# Altium PCB PCB1.PcbDoc (part 2 of 2)
Units mm, origin at the board's own origin, x right, y up, seen from the top; angles counter-clockwise.
Board outline 50.75 x 57.45 mm, 4 copper layers (Top Layer, GND, PWR, Bottom Layer), stack 1.591 mm thick; 64 components, 47 nets, 256 pads, 141 vias.
Unrouted connection lines stored in the file: 59.
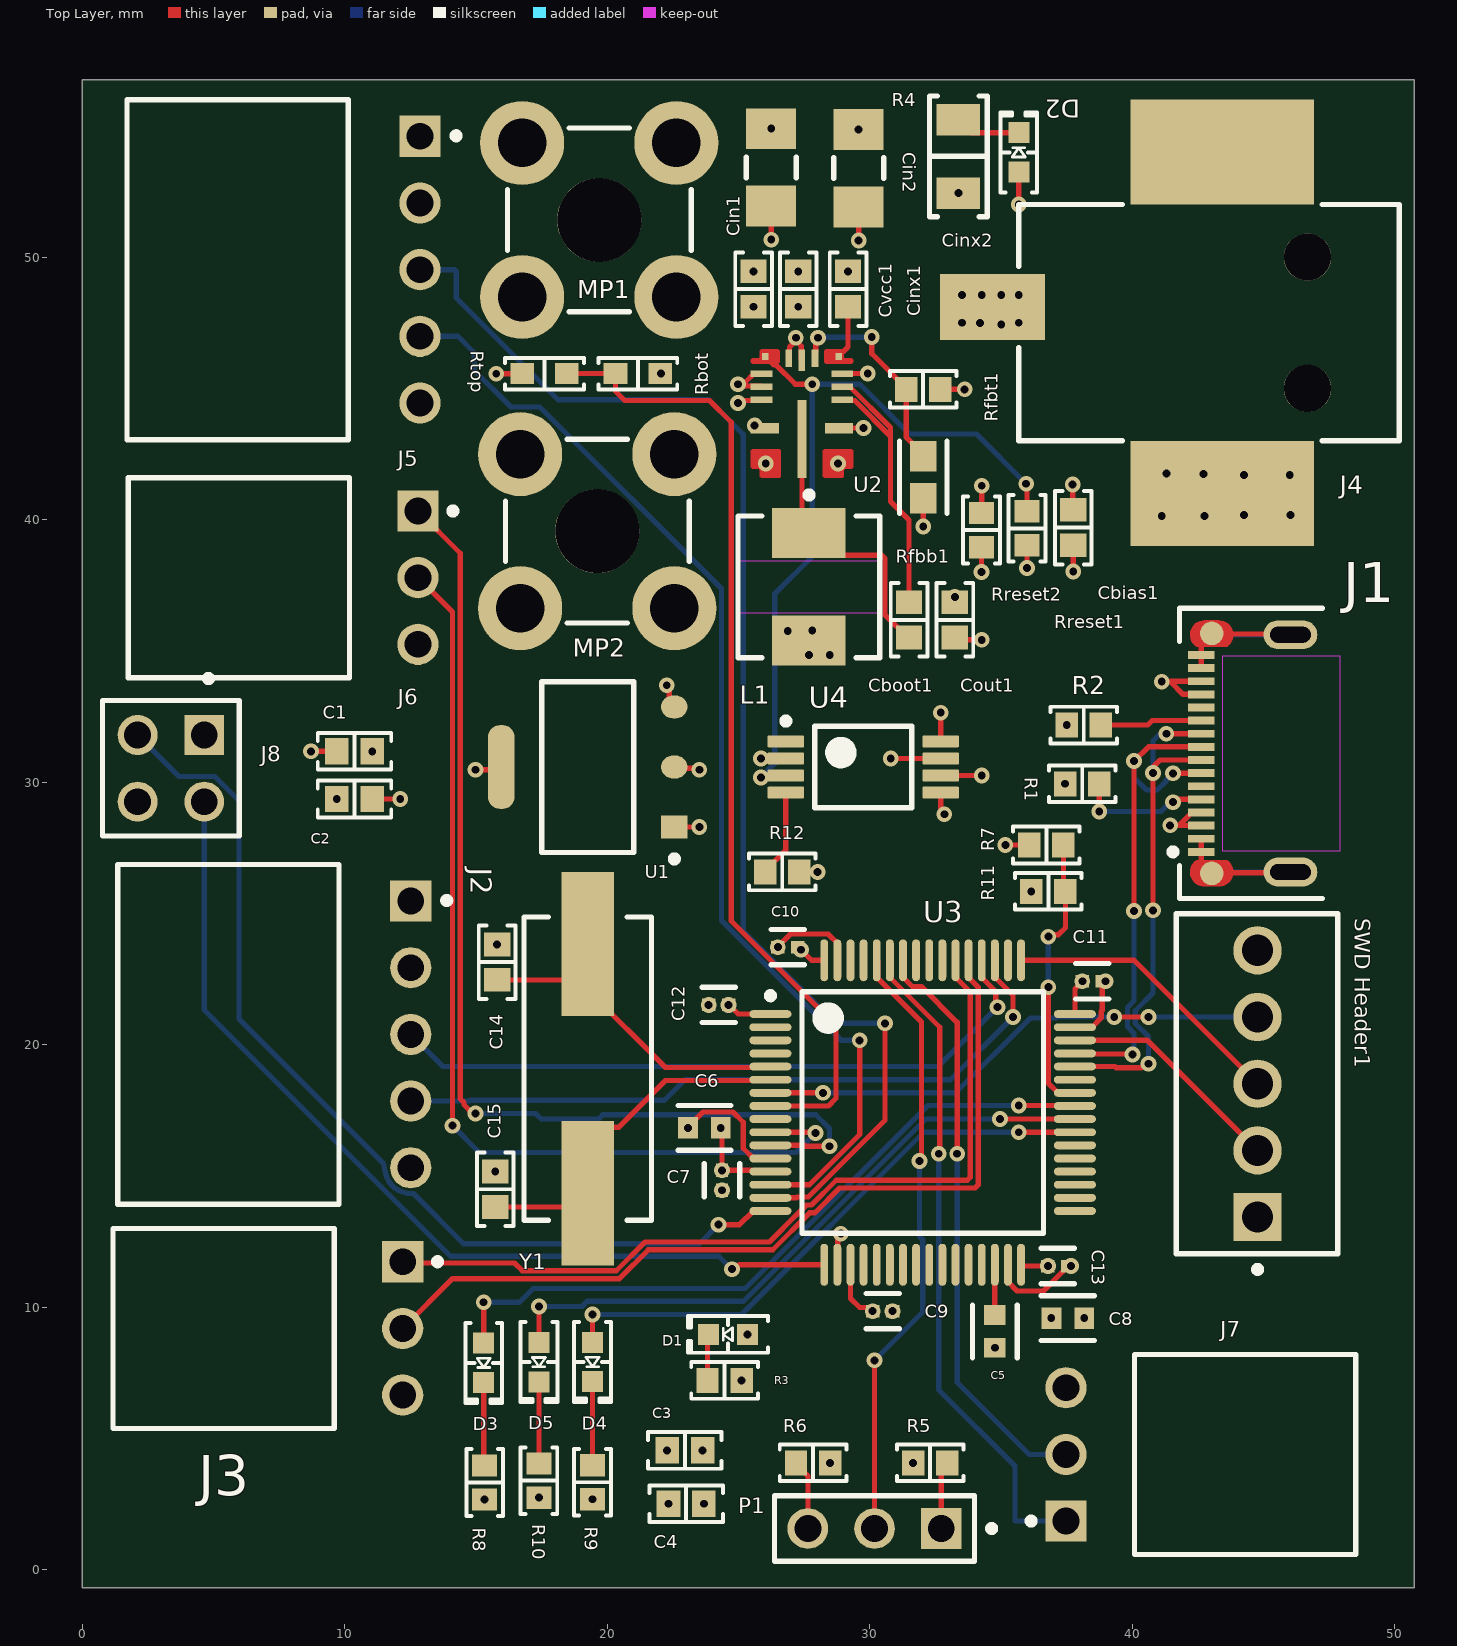
[diagram p0: Top Layer view]

## Via types
v1: diameter 0.6, hole 0.3, Top Layer to Bottom Layer, tented both sides, 140 vias
v2: diameter 0.6, hole 0.3, Top Layer to Bottom Layer, tented top, 1 vias

## Nets (pads, with @x,y where several pads share a name; then routed paths per layer and width w, separated by ;. In a path a pad name is that pad's centre, name@x,y a point inside that pad or via, vN(x,y) a via of type N, cw(c..) or ccw(c..) an arc to the next point about the centre after c; other vN are vias at no path point) (continued)
5V_SYS: (continued)
  Top Layer w0.2: v1(8.713,31.179) C1.2 ; C2.2 v1(12.114,29.362) ; v1(22.268,33.694) 22.268,33.586 22.361,33.493 22.361,33.066 U1.3 ; v1(30.799,30.907) U4.7
  PWR w0.2: v1(22.268,33.694) v1@22.333,33.628
5V_USB: J1.A4 J1.A9 J1.B4 J1.B9 R7.2 U4.6 | length 7.6
  Top Layer w0.2: U4.6 v1(34.266,30.257) ; v1(35.166,27.609) R7.2 ; v1(41.127,33.834) 41.446,33.834 ; v1(41.446,28.359) 41.786,28.359 ; J1.A4 41.795,28.35 41.786,28.359 ; J1.B9 42.277,28.85 41.786,28.359 ; J1.B4 41.93,33.35 41.446,33.834 ; J1.A9 41.462,33.85 41.446,33.834
26V0: Cin1.1 Cin2.1 Cinx1.1 Cinx2.1 MP1.1 Rtop.1 U2.2 U2.13 U2.14 | length 5.9
  Top Layer w0.2: v1(15.773,45.561) 16.753,45.561 Rtop.1 ; v1(24.98,44.448) 25.088,44.448 25.184,44.544 25.853,44.544 U2.13 ; v1(25.616,43.596) 25.718,43.494 U2.14 ; v1(26.246,50.671) Cin1.1 ; U2.2 28.832,43.497 29.763,43.497 v1(29.766,43.5) ; v1(29.578,50.644) Cin2.1
  other v1: 25.576,48.113 27.279,48.113
BOOT0: P1.2 U3.60 | length 23.2
  Top Layer w0.2: P1.2 v1(30.184,7.979) ; U3.60 30.301,23.184 30.301,22.539 31.975,20.865 31.975,15.649 v1(31.9,15.574)
  Bottom Layer w0.2: v1(30.184,7.979) 32.016,9.81 32.016,12.58 31.9,12.696 v1(31.9,15.574)
GND: "SWD Header1.5" C1.1 C2.1 C3.1 C4.1 C5.2 C6.2 C7.2 C8.2 C9.2 C10.2 C11.2 C12.2 C13.2 C14.1 C15.1 Cbias1.2 Cin1.2 Cin2.2 Cinx1.2 Cinx2.2 Cout1.2 Cvcc1.2 J1.1 J1.2 J1.3 J1.4 J1.A1 J1.A12 J1.B1 J1.B12 J2.2 J3.3 J4.2 J5.2 J6.3 J7.3 J8.4 MP2.1 R1.1 R2.1 R3.1 R4.2 R6.1 R8.1 R9.1 R10.1 R11.1 R12.2 Rbot.2 Rfbb1.2 Rreset2.2 U1.1 U2.1 U2.8 U2.9 U2.11 U2.12 U2.15 U3.12 U3.18 U3.31 U3.47 U3.63 U4.2 U4.5 | length 40.8
  Top Layer w0.2: U1.1 v1(23.51,28.292) ; v1(23.072,16.835) 23.072,16.862 23.651,17.442 24.788,17.442 25.18,17.049 25.18,16.055 25.566,15.669 U3.12 ; v1(25.854,30.907) U4.2 ; U2.12 25.853,45.094 25.047,45.094 v1(24.98,45.161) 25.056,45.238 25.259,45.238 25.59,45.569 U2.11 ; v1(26.5,23.719) 26.521,23.719 26.658,23.855 26.658,23.897 26.98,24.219 28.416,24.219 28.766,23.869 U3.63 ; U2.9 26.941,46.182 26.941,46.583 v1@27.186,46.828 ; v1(27.186,46.936) v1@27.186,46.828 ; R12.2 v1(28.017,26.586) ; U2.8 27.391,46.107 27.391,46.623 v1@27.186,46.828 ; U3.18 28.785,11.638 28.785,12.582 28.899,12.695 v1(28.899,12.804) ; v1(32.037,39.744) Rfbb1.2 ; U4.5 32.704,29.029 32.843,28.89 v1(32.843,28.782) ; Rreset2.2 34.266,40.265 v1(34.266,41.296) ; U3.31 35.266,10.969 35.616,10.619 36.614,10.619 37.387,11.392 37.387,11.433 37.523,11.569 v1(37.666,11.569) ; v1(37.732,41.344) 37.732,40.398 Cbias1.2 ; U3.47 38.466,20.669 38.816,21.019 38.816,21.264 38.858,21.305 38.858,22.298 v1(38.979,22.419) ; J1.B12 J1.A1 42.627,26.971 43.027,26.571 43.027,26.53 43.052,26.555 46.002,26.555 J1.3 ; J1.B1 J1.A12 42.627,35.23 43.027,35.63 43.027,35.67 43.052,35.645 46.002,35.645 J1.4
  Bottom Layer w0.2: J1.1@43.027,26.58 J1.3 ; J1.2@43.027,35.62 J1.4
  other v1: 23.683,2.517 15.33,2.674 19.441,2.684 17.397,2.746 28.491,4.074 23.632,4.549 25.122,7.214 34.766,8.458 38.172,9.585 30.868,9.853 24.374,14.46 15.733,15.171 23.865,21.519 15.805,23.821 36.154,25.845 9.696,29.362 37.446,29.942 11.046,31.179 37.504,32.177 33.243,37.064 41.127,40.146 42.752,40.146 44.255,40.175 46.027,40.175 44.255,41.704 46.002,41.704 42.708,41.744 41.3,41.759 26.041,42.144 28.791,42.144 22.041,45.569 25.576,49.463 27.279,49.463 29.176,49.463 29.578,54.873 26.246,54.9
  other v2: 33.375,52.448
IND_BLU: D4.1 U3.39 | length 22.3
  Top Layer w0.2: D4.1 v1(19.441,9.728) ; v1(35.677,16.669) U3.39
  Bottom Layer w0.2: v1(19.441,9.728) 25.116,9.728 32.057,16.669 v1(35.677,16.669)
IND_GRN: D5.1 U3.40 | length 24.7
  Top Layer w0.2: D5.1 v1(17.399,10.028) ; v1(34.961,17.169) U3.40
  Bottom Layer w0.2: v1(17.399,10.028) 19.034,10.028 19.234,10.228 25.191,10.228 32.133,17.169 v1(34.961,17.169)
IND_RED: D3.1 U3.41 | length 27.2
  Top Layer w0.2: D3.1 v1(15.293,10.191) ; v1(35.677,17.685) 37.8,17.685 U3.41
  Bottom Layer w0.2: v1(15.293,10.191) 16.655,10.191 17.184,10.719 25.259,10.719 32.225,17.685 v1(35.677,17.685)
NetC5_1: C5.1 U3.30 | length 2.1
  Top Layer w0.2: C5.1@34.487,9.629 C5.1@34.766,9.908 ; C5.1@34.766,9.887 U3.30
NetCboot1_1: Cboot1.1 L1.1 U2.16 | length 10.4
  Top Layer w0.2: U2.16 27.416,39.766 L1.1 28.536,38.646 30.469,38.646 30.586,38.529 30.586,36.378 31.45,35.514 Cboot1.1
NetCboot1_2: Cboot1.2 U2.3 U2.4 | length 11.8
  Top Layer w0.2: U2.3 28.979,44.544 29.429,44.544 30.794,43.179 ; U2.4 29.241,45.069 30.794,43.516 30.794,43.179 ; Cboot1.2 31.5,39.992 30.794,40.697 30.794,43.179
NetCvcc1_1: Cvcc1.1 U2.6 | length 2
  Top Layer w0.2: U2.6 29.176,46.579 Cvcc1.1
NetD1_2: D1.2 R3.2 | length 1.8
  Top Layer w0.2: R3.2 23.822,8.94 D1.2
NetD2_2: D2.2 R4.1 | length 2.5
  Top Layer w0.2: R4.1 33.875,54.748 D2.2
NetD3_2: D3.2 R8.2 | length 3.2
  Top Layer w0.2: D3.2 15.293,4.011 R8.2
NetD4_2: D4.2 R9.2 | length 3.2
  Top Layer w0.2: R9.2 D4.2
NetD5_2: D5.2 R10.2 | length 3.1
  Top Layer w0.2: R10.2 17.399,4.048 D5.2
NetJ1_A5: J1.A5 R1.2 | length 5.1
  Top Layer w0.2: v1(38.746,28.89) R1.2 ; v1(41.554,29.242) 41.663,29.35 J1.A5
  Bottom Layer w0.2: v1(38.746,28.89) 41.094,28.89 41.446,29.242 v1(41.554,29.242)
NetJ1_B5: J1.B5 R2.2 | length 3.9
  Top Layer w0.2: R2.2 40.592,32.177 40.765,32.35 J1.B5
NetP1_1: P1.1 R5.2 | length 2.6
  Top Layer w0.2: P1.1 32.724,3.844 R5.2
NetP1_3: P1.3 R6.2 | length 2.7
  Top Layer w0.2: R6.2 27.191,4.024 27.644,3.571 P1.3
NetR7_1: R7.1 R11.2 U3.42 | length 10.7
  Top Layer w0.2: v1(36.804,22.194) 36.804,18.531 37.166,18.169 U3.42 ; v1(36.804,24.119) 36.881,24.196 37.191,24.196 37.454,24.459 R11.2 37.378,25.922 R7.1
  Bottom Layer w0.2: v1(36.804,22.194) v1(36.804,24.119)
NetR12_1: R12.1 U4.4 | length 3.3
  Top Layer w0.2: R12.1 26.017,26.636 26.804,27.422 U4.4
NetRbot_1: Rbot.1 Rtop.2 U3.8 | length 37.5
  Top Layer w0.2: Rtop.2 Rbot.1 20.316,44.894 20.666,44.544 23.893,44.544 24.723,43.715 24.723,24.72 28.72,20.723 28.72,17.962 28.427,17.669 U3.8
NetRfbb1_1: Rfbb1.1 Rfbt1.2 U2.7 | length 8.2
  Top Layer w0.2: U2.7 27.916,46.37 27.941,46.395 27.941,46.74 28.029,46.828 v1(28.029,46.936) ; v1(30.078,46.966) 30.078,46.328 31.387,45.019 31.387,43.15 32.037,42.5 Rfbb1.1
  Bottom Layer w0.2: v1(28.029,46.936) 28.043,46.951 30.064,46.951 v1(30.078,46.966)
NRST: "SWD Header1.4" U3.7 | length 19.8
  Top Layer w0.2: U3.7 v1(28.22,18.169) ; v1(39.316,21.057) v1(40.616,21.057)
  Bottom Layer w0.2: v1(28.22,18.169) 33.274,18.169 36.124,21.019 37.105,21.019 37.142,21.057 v1(39.316,21.057) ; v1(40.616,21.057) 44.775,21.057
OSC_IN: C14.2 U3.5 Y1.1 | length 14.9
  Top Layer w0.2: C14.2 18.359,22.471 19.259,23.371 Y1.1 19.259,22.091 22.214,19.135 U3.5@26.856,19.135
OSC_OUT: C15.2 U3.6 Y1.2 | length 14.1
  Top Layer w0.2: C15.2 18.739,13.821 Y1.2 19.259,15.962 20.159,16.862 20.441,16.862 22.214,18.635 U3.6@26.856,18.635
Reset: Rreset1.1 U2.10 U4.3 | length 29.8
  Top Layer w0.2: v1(25.854,30.183) 25.89,30.22 26.767,30.22 U4.3 ; U2.10 26.341,45.894 26.434,45.894 27.167,45.161 v1(27.811,45.161) ; v1@35.929,41.404 35.989,41.345 Rreset1.1
  Bottom Layer w0.2: v1(25.854,30.183) 26.379,30.708 26.379,37.172 27.811,38.605 v1(27.811,45.161) 29.627,45.161 31.52,43.268 34.066,43.268 v1(35.959,41.375)
SWCLK: "SWD Header1.3" U3.49 | length 11
  Top Layer w0.2: U3.49 40.072,23.219 44.775,18.517
SWDIO: "SWD Header1.2" U3.46 | length 8.7
  Top Layer w0.2: U3.46 40.582,20.169 44.775,15.977
UART1_RX: J7.1 U3.59 | length 25.3
  Top Layer w0.2: U3.59 30.799,23.187 30.799,22.537 32.666,20.669 32.666,15.881 v1(32.631,15.846)
  Bottom Layer w0.2: v1(32.631,15.846) 32.631,6.854 35.534,3.95 35.534,1.854 J7.1
UART1_TX: J7.2 U3.58 | length 22.4
  Top Layer w0.2: U3.58 31.266,22.574 31.621,22.219 31.966,22.219 33.331,20.854 v1(33.331,15.846)
  Bottom Layer w0.2: v1(33.331,15.846) 33.331,7.143 36.08,4.394 J7.2
UART2_RX: J8.2 U3.17 | length 35.7
  Top Layer w0.2: v1(24.749,11.451) 24.857,11.451 25.025,11.619 U3.17
  Bottom Layer w0.2: J8.2 4.648,21.325 14.031,11.942 24.249,11.942 24.739,11.451 v1(24.749,11.451)
UART2_TX: J8.3 U3.16 | length 37.7
  Top Layer w0.2: v1(24.243,13.146) 25.043,13.146 25.566,13.669 U3.16
  Bottom Layer w0.2: J8.3 3.688,30.221 5.046,30.221 5.969,29.298 5.969,20.98 11.471,15.478 11.552,15.107 ccw(c12.515,15.316) 12.515,14.331 12.618,14.331 12.677,14.273 14.472,12.478 14.53,12.419 23.517,12.419 v1(24.243,13.146)
UART3_RX: J2.3 U3.52 | length 25.8
  Top Layer w0.2: U3.52 34.266,22.569 34.803,22.032 34.803,21.493 v1(34.864,21.432)
  Bottom Layer w0.2: J2.3 13.742,19.169 32.601,19.169 v1(34.864,21.432)
UART3_TX: J2.4 U3.51 | length 26.7
  Top Layer w0.2: U3.51 34.766,22.574 35.454,21.886 v1(35.454,21.057)
  Bottom Layer w0.2: J2.4 14.745,17.856 14.774,17.885 22.178,17.885 22.962,18.669 33.067,18.669 v1(35.454,21.057)
UART4_RX: J5.3 U3.15 | length 50.6
  Top Layer w0.2: U3.15 27.206,14.169 27.232,14.196 27.657,14.196 30.586,17.125 v1(30.586,20.816)
  Bottom Layer w0.2: J5.3 14.19,49.528 14.244,49.474 14.244,48.458 18.133,44.569 23.868,44.569 25.183,43.255 25.183,24.329 28.696,20.816 v1(30.586,20.816)
UART4_TX: J5.4 U3.14 | length 43.4
  Top Layer w0.2: U3.14 27.706,14.669 29.617,16.581 v1(29.617,20.169)
  Bottom Layer w0.2: J5.4 14.296,46.988 14.304,46.996 14.935,46.364 14.935,45.692 16.327,44.3 17.431,44.3 24.355,37.376 24.355,24.733 28.919,20.169 v1(29.617,20.169)
UART5_RX: J3.1 U3.54 | length 31.7
  Top Layer w0.2: J3.1 12.252,11.691 16.467,11.691 16.767,11.391 20.341,11.391 21.441,12.491 26.182,12.491 27.216,13.524 27.588,13.896 27.781,13.896 28.725,14.84 33.714,14.84 33.831,14.957 33.831,22.009 33.266,22.574 U3.54
UART5_TX: J3.2 U3.53 | length 32.9
  Top Layer w0.2: J3.2 14.103,11.091 20.466,11.091 21.566,12.191 26.307,12.191 27.712,13.596 27.905,13.596 28.849,14.54 34.014,14.54 34.131,14.657 34.131,22.204 33.766,22.569 U3.53
UART6_RX: J6.1 U3.11 | length 40.7
  Top Layer w0.2: J6.1 14.403,38.724 14.403,17.938 14.544,17.796 14.544,17.714 14.873,17.385 v1(14.981,17.385) ; U3.11 27.511,16.169 27.545,16.135 v1(28.464,16.135)
  Bottom Layer w0.2: v1(14.981,17.385) 17.269,17.385 17.485,17.169 19.665,17.169 19.831,17.335 27.943,17.335 28.464,16.814 v1(28.464,16.135)
UART6_TX: J6.2 U3.10 | length 37.7
  Top Layer w0.2: J6.2 14.103,36.484 v1(14.103,16.919) ; U3.10 27.902,16.669 v1(27.937,16.635)
  Bottom Layer w0.2: v1(14.103,16.919) 15.126,15.896 27.198,15.896 v1(27.937,16.635)
USB_D_N: J1.A7 J1.B7 U3.44 | length 19.8
  Top Layer w0.2: U3.44 39.342,19.169 39.386,19.125 40.355,19.125 40.508,19.277 v1(40.616,19.277) ; v1(40.792,25.121) v1(40.792,30.35) 40.792,30.582 41.061,30.85 J1.B7 ; v1(41.3,31.85) J1.A7
  Bottom Layer w0.2: v1(40.616,19.277) 40.616,20.316 40.116,20.816 40.116,21.298 40.792,21.974 v1(40.792,25.121) ; v1(40.792,30.35) 40.792,31.582 41.061,31.85 v1(41.3,31.85)
USB_D_P: J1.A6 J1.B6 U3.45 | length 20.1
  Top Layer w0.2: U3.45 37.835,19.65 39.983,19.65 v1(40.008,19.625) ; v1(40.072,25.092) v1(40.072,30.806) 40.616,31.35 J1.B6 ; v1(41.554,30.34) 41.56,30.345 42.622,30.345 J1.A6
  Bottom Layer w0.2: v1(40.008,19.625) 40.072,19.689 40.072,20.435 39.816,20.691 39.816,21.422 40.072,21.678 v1(40.072,25.092) ; v1(40.072,30.806) 40.072,30.174 40.542,29.704 40.956,29.704 41.3,30.048 41.3,30.086 v1(41.554,30.34)
pads on no net: J1.A8 J1.B8 J2.1 J4.3 J4.MH1 J4.MH2 J5.1 MP1.MH1 MP2.MH1 U3.2 U3.3 U3.4 U3.9 U3.20 U3.21 U3.22 U3.23 U3.24 U3.25 U3.26 U3.27 U3.28 U3.29 U3.33 U3.34 U3.35 U3.36 U3.37 U3.38 U3.43 U3.50 U3.55 U3.56 U3.57 U3.61 U3.62 U4.1

## Polygon pours and split planes (outlines as drawn)
5V_SYS on PWR "NONET_L02_P-001" (solid, pour order 5): 31.337,31.702 31.297,31.662 31.251,30.704 31.022,30.704 24.124,30.704 22.25,32.577 14.01,32.577 14.01,5.385 1.414,5.385 0.775,4.746 0.675,4.846 0.675,56.103 14.047,56.103 14.244,55.906 14.01,55.672 14.01,34.246 23.368,34.246 23.92,33.694 23.92,31.929 31.002,31.929 31.126,31.805 31.126,31.702
3V3 on PWR "NONET_L02_P-001" (solid, pour order 7): 14.785,31.951 22.172,31.951 25.814,28.309 32.024,28.309 33.166,27.167 33.166,24.546 46.923,24.546 46.99,24.613 47.83,23.773 47.83,8.887 38.765,-0.178 20.93,-0.178 20.93,22.588 14.785,28.733 14.818,28.766 14.818,31.928
5V_USB on PWR "NONET_L02_P-001" (solid, pour order 6): 39.627,36.933 33.953,31.258 33.875,31.258 33.875,25.111 34.171,24.815 42.202,24.815 42.202,36.438 41.655,36.984 39.627,36.984
5V_BUCK on PWR "NONET_L02_P-001" (solid, pour order 4): 32.275,56.148 32.334,56.206 39.005,56.206 39.005,37.366 34.066,32.427 34.066,32.382 34.019,32.429 24.641,32.429 24.641,40.564 24.774,40.697 30.794,40.697 30.794,44.51 29.627,45.677 29.627,46.096 32.477,48.946 32.477,56.148
26V0 on PWR "NONET_L02_P-001" (solid, pour order 1): 14.795,56.148 14.884,56.058 14.884,45.019 23.636,45.019 24.643,44.012 24.643,41.583 29.707,41.583 30.254,41.583 30.254,44.456 29.927,44.782 28.816,45.893 31.561,48.639 31.571,48.639 31.571,56.023 31.387,56.206 31.337,56.156 14.961,56.156
GND on GND "GND_L02_P000" (solid, pour order 0): 0.74,55.923 0.838,55.825 0.838,1.264 49.194,1.264 49.944,2.015 49.944,56.123 0.74,56.123